# EAGLE board AutoSpiel v1.2a (EAGLE 9.2.0)
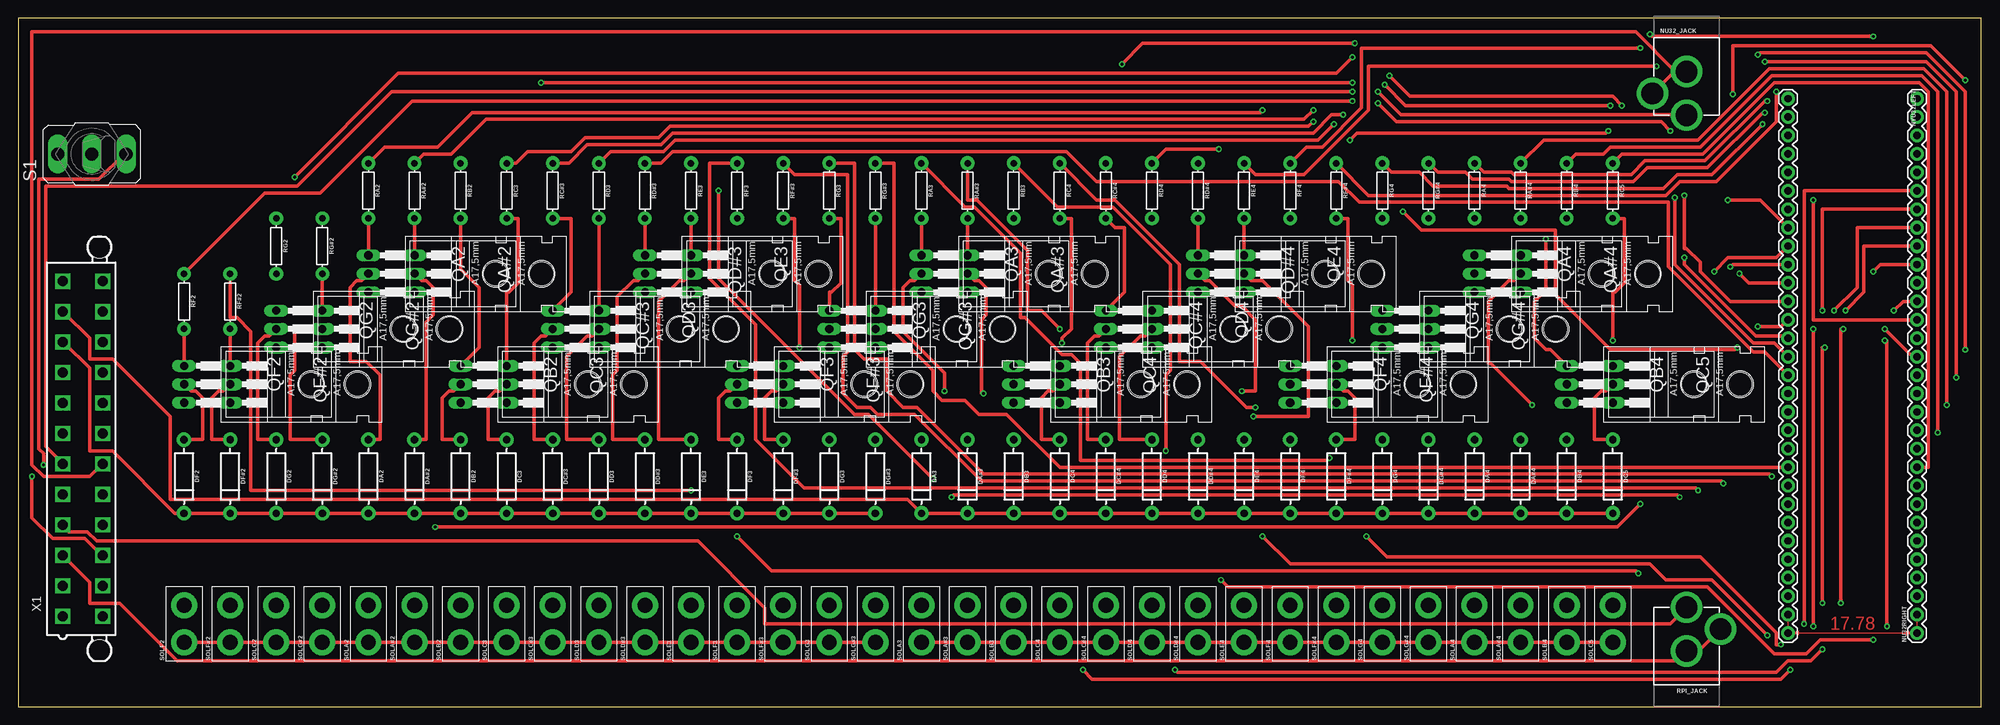
[diagram p0: board, top side]
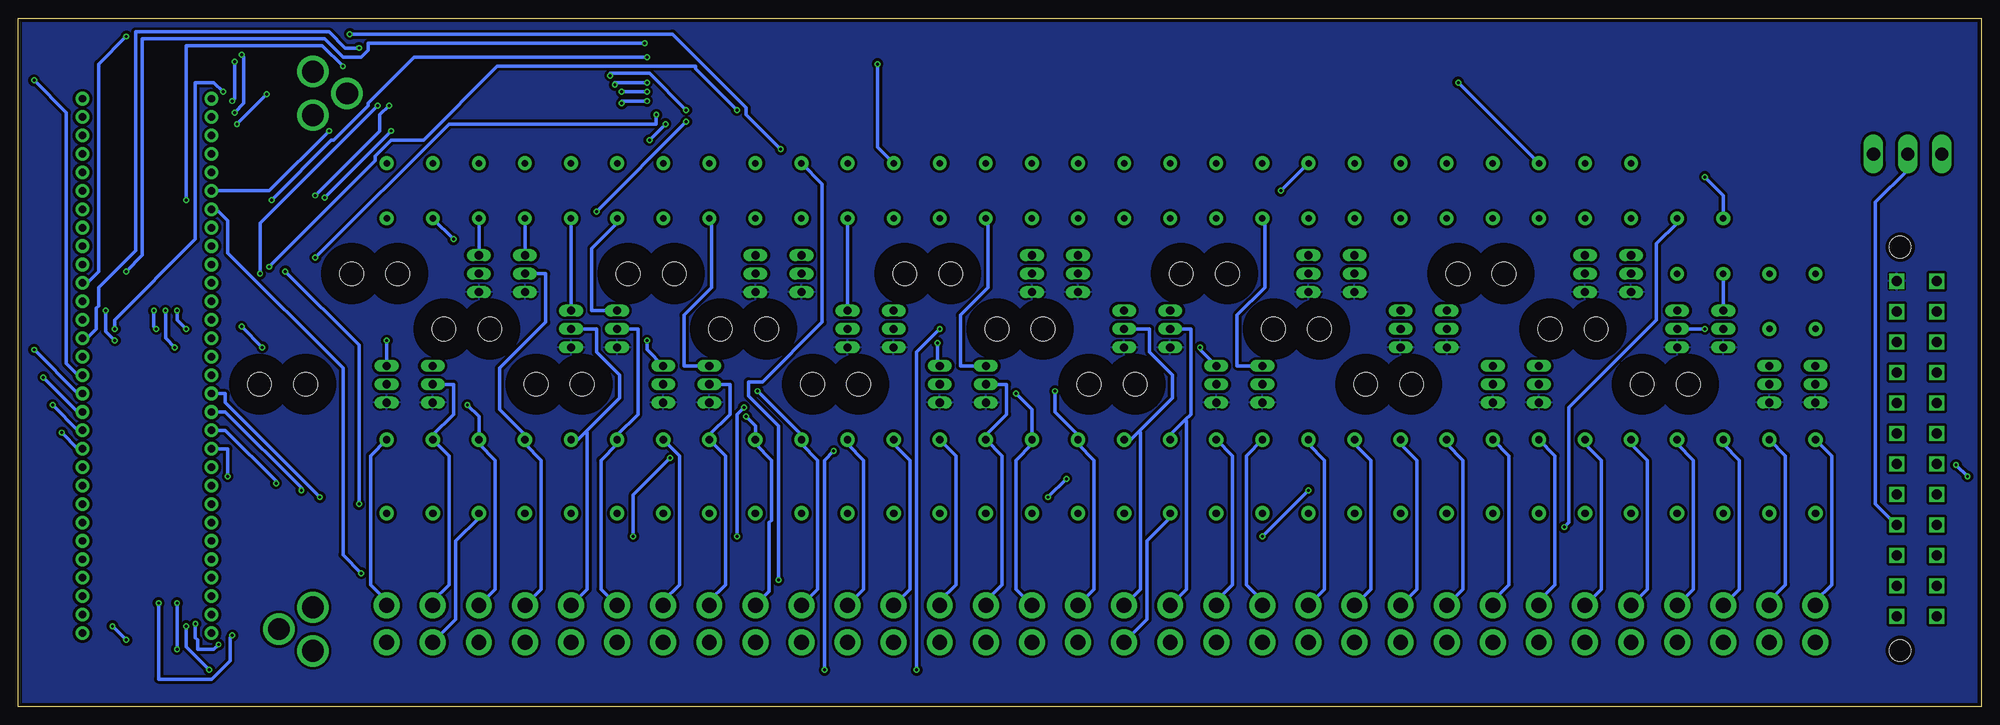
[diagram p1: board, bottom side, seen from below]

Size 270.49 x 94.92 mm. Coordinates in mm from the lower left corner, seen from the top.
Outline: 0,0 270.49,0 270.49,94.92 0,94.92 0,0
Copper layers (1*16): Top 0.035mm / dielectric 1.5mm / Bottom 0.035mm
Design rules "Standard *": minimum track width 20mil, minimum drill 15mil, track to track 15mil, track to pad 15mil, pad to pad 15mil, via to via 15mil, smd to smd 10mil, copper to edge 20mil, drill to drill 10mil, minimum pad ring 8mil, minimum via ring 8mil, stop-mask expansion 4mil, vias tented up to drill 0mil, thermal gap 10mil

## Footprints (pad centres in the part's own frame; a part is rotated, then mirrored left to right if it is on the bottom)
DIODE-1N4001 = drill 1 pad 1.981: A -5.08,0; C 5.08,0
POWER_JACK_PTH = drill 2.997 pad 4.318: GND 0,7.7; GNDBREAK 4.7,10.7; PWR 0,13.7
1X30 = drill 1.016 pad 1.88: 1 0,0; 2 2.54,0; 3 5.08,0; 4 7.62,0; 5 10.16,0; 6 12.7,0; 7 15.24,0; 8 17.78,0; 9 20.32,0; 10 22.86,0; 11 25.4,0; 12 27.94,0; 13 30.48,0; 14 33.02,0; 15 35.56,0; 16 38.1,0; 17 40.64,0; 18 43.18,0; 19 45.72,0; 20 48.26,0; 21 50.8,0; 22 53.34,0; 23 55.88,0; 24 58.42,0; 25 60.96,0; 26 63.5,0; 27 66.04,0; 28 68.58,0; 29 71.12,0; 30 73.66,0
TO220AH = drill 1.118 long: B -2.54,-6.35; C 0,-6.35; E 2.54,-6.35 | hole 3.302: 0,11.176
AXIAL-0.3 = drill 0.9 pad 1.88: P$1 -3.81,0; P$2 3.81,0
M9040P = drill 1.803 long: 1 0,4.699; 2 0,0; 3 0,-4.699
1X02_XTRA_BIG = drill 2.057 pad 3.556: 1 -2.54,0; 2 2.54,0
5566-24 = drill 1.4 square: 1 23.1,-2.75; 2 18.9,-2.75; 3 14.7,-2.75; 4 10.5,-2.75; 5 6.3,-2.75; 6 2.1,-2.75; 7 -2.1,-2.75; 8 -6.3,-2.75; 9 -10.5,-2.75; 10 -14.7,-2.75; 11 -18.9,-2.75; 12 -23.1,-2.75; 13 23.1,2.75; 14 18.9,2.75; 15 14.7,2.75; 16 10.5,2.75; 17 6.3,2.75; 18 2.1,2.75; 19 -2.1,2.75; 20 -6.3,2.75; 21 -10.5,2.75; 22 -14.7,2.75; 23 -18.9,2.75; 24 -23.1,2.75 | hole 3: 27.8,2.29; -27.8,2.29

## Placement (x,y rotation side)
DA2  1A/50V/1.1V  [DIODE-1N4001]  48.26,31.75 270 top
DA3  1A/50V/1.1V  [DIODE-1N4001]  124.46,31.75 270 top
DA4  1A/50V/1.1V  [DIODE-1N4001]  200.66,31.75 270 top
DA#2  1A/50V/1.1V  [DIODE-1N4001]  54.61,31.75 270 top
DA#3  1A/50V/1.1V  [DIODE-1N4001]  130.81,31.75 270 top
DA#4  1A/50V/1.1V  [DIODE-1N4001]  207.01,31.75 270 top
DB2  1A/50V/1.1V  [DIODE-1N4001]  60.96,31.75 270 top
DB3  1A/50V/1.1V  [DIODE-1N4001]  137.16,31.75 270 top
DB4  1A/50V/1.1V  [DIODE-1N4001]  213.36,31.75 270 top
DC3  1A/50V/1.1V  [DIODE-1N4001]  67.31,31.75 270 top
DC4  1A/50V/1.1V  [DIODE-1N4001]  143.51,31.75 270 top
DC5  1A/50V/1.1V  [DIODE-1N4001]  219.71,31.75 270 top
DC#3  1A/50V/1.1V  [DIODE-1N4001]  73.66,31.75 270 top
DC#4  1A/50V/1.1V  [DIODE-1N4001]  149.86,31.75 270 top
DD3  1A/50V/1.1V  [DIODE-1N4001]  80.01,31.75 270 top
DD4  1A/50V/1.1V  [DIODE-1N4001]  156.21,31.75 270 top
DD#3  1A/50V/1.1V  [DIODE-1N4001]  86.36,31.75 270 top
DD#4  1A/50V/1.1V  [DIODE-1N4001]  162.56,31.75 270 top
DE3  1A/50V/1.1V  [DIODE-1N4001]  92.71,31.75 270 top
DE4  1A/50V/1.1V  [DIODE-1N4001]  168.91,31.75 270 top
DF2  1A/50V/1.1V  [DIODE-1N4001]  22.86,31.75 270 top
DF3  1A/50V/1.1V  [DIODE-1N4001]  99.06,31.75 270 top
DF4  1A/50V/1.1V  [DIODE-1N4001]  175.26,31.75 270 top
DF#2  1A/50V/1.1V  [DIODE-1N4001]  29.21,31.75 270 top
DF#3  1A/50V/1.1V  [DIODE-1N4001]  105.41,31.75 270 top
DF#4  1A/50V/1.1V  [DIODE-1N4001]  181.61,31.75 270 top
DG2  1A/50V/1.1V  [DIODE-1N4001]  35.56,31.75 270 top
DG3  1A/50V/1.1V  [DIODE-1N4001]  111.76,31.75 270 top
DG4  1A/50V/1.1V  [DIODE-1N4001]  187.96,31.75 270 top
DG#2  1A/50V/1.1V  [DIODE-1N4001]  41.91,31.75 270 top
DG#3  1A/50V/1.1V  [DIODE-1N4001]  118.11,31.75 270 top
DG#4  1A/50V/1.1V  [DIODE-1N4001]  194.31,31.75 270 top
NU32_JACK  POWER_JACK  [POWER_JACK_PTH]  229.87,95.25 180 top
NU32RIGHT  [1X30]  261.62,10.16 90 top
NYU32LEFT  [1X30]  243.84,10.16 90 top
QA2  TIP120  [TO220AH]  54.61,59.69 270 top
QA3  TIP120  [TO220AH]  130.81,59.69 270 top
QA4  TIP120  [TO220AH]  207.01,59.69 270 top
QA#2  TIP120  [TO220AH]  60.96,59.69 270 top
QA#3  TIP120  [TO220AH]  137.16,59.69 270 top
QA#4  TIP120  [TO220AH]  213.36,59.69 270 top
QB2  TIP120  [TO220AH]  67.31,44.45 270 top
QB3  TIP120  [TO220AH]  143.51,44.45 270 top
QB4  TIP120  [TO220AH]  219.71,44.45 270 top
QC3  TIP120  [TO220AH]  73.66,44.45 270 top
QC4  TIP120  [TO220AH]  149.86,44.45 270 top
QC5  TIP120  [TO220AH]  226.06,44.45 270 top
QC#3  TIP120  [TO220AH]  80.01,52.07 270 top
QC#4  TIP120  [TO220AH]  156.21,52.07 270 top
QD3  TIP120  [TO220AH]  86.36,52.07 270 top
QD4  TIP120  [TO220AH]  162.56,52.07 270 top
QD#3  TIP120  [TO220AH]  92.71,59.69 270 top
QD#4  TIP120  [TO220AH]  168.91,59.69 270 top
QE3  TIP120  [TO220AH]  99.06,59.69 270 top
QE4  TIP120  [TO220AH]  175.26,59.69 270 top
QF2  TIP120  [TO220AH]  29.21,44.45 270 top
QF3  TIP120  [TO220AH]  105.41,44.45 270 top
QF4  TIP120  [TO220AH]  181.61,44.45 270 top
QF#2  TIP120  [TO220AH]  35.56,44.45 270 top
QF#3  TIP120  [TO220AH]  111.76,44.45 270 top
QF#4  TIP120  [TO220AH]  187.96,44.45 270 top
QG2  TIP120  [TO220AH]  41.91,52.07 270 top
QG3  TIP120  [TO220AH]  118.11,52.07 270 top
QG4  TIP120  [TO220AH]  194.31,52.07 270 top
QG#2  TIP120  [TO220AH]  48.26,52.07 270 top
QG#3  TIP120  [TO220AH]  124.46,52.07 270 top
QG#4  TIP120  [TO220AH]  200.66,52.07 270 top
RA2  1k  [AXIAL-0.3]  48.26,71.12 270 top
RA3  1k  [AXIAL-0.3]  124.46,71.12 270 top
RA4  1k  [AXIAL-0.3]  200.66,71.12 270 top
RA#2  1k  [AXIAL-0.3]  54.61,71.12 270 top
RA#3  1k  [AXIAL-0.3]  130.81,71.12 270 top
RA#4  1k  [AXIAL-0.3]  207.01,71.12 270 top
RB2  1k  [AXIAL-0.3]  60.96,71.12 270 top
RB3  1k  [AXIAL-0.3]  137.16,71.12 270 top
RB4  1k  [AXIAL-0.3]  213.36,71.12 270 top
RC3  1k  [AXIAL-0.3]  67.31,71.12 270 top
RC4  1k  [AXIAL-0.3]  143.51,71.12 270 top
RC5  1k  [AXIAL-0.3]  219.71,71.12 270 top
RC#3  1k  [AXIAL-0.3]  73.66,71.12 270 top
RC#4  1k  [AXIAL-0.3]  149.86,71.12 270 top
RD3  1k  [AXIAL-0.3]  80.01,71.12 270 top
RD4  1k  [AXIAL-0.3]  156.21,71.12 270 top
RD#3  1k  [AXIAL-0.3]  86.36,71.12 270 top
RD#4  1k  [AXIAL-0.3]  162.56,71.12 270 top
RE3  1k  [AXIAL-0.3]  92.71,71.12 270 top
RE4  1k  [AXIAL-0.3]  168.91,71.12 270 top
RF2  1k  [AXIAL-0.3]  22.86,55.88 270 top
RF3  1k  [AXIAL-0.3]  99.06,71.12 270 top
RF4  1k  [AXIAL-0.3]  175.26,71.12 270 top
RF#2  1k  [AXIAL-0.3]  29.21,55.88 270 top
RF#3  1k  [AXIAL-0.3]  105.41,71.12 270 top
RF#4  1k  [AXIAL-0.3]  181.61,71.12 270 top
RG2  1k  [AXIAL-0.3]  35.56,63.5 270 top
RG3  1k  [AXIAL-0.3]  111.76,71.12 270 top
RG4  1k  [AXIAL-0.3]  187.96,71.12 270 top
RG#2  1k  [AXIAL-0.3]  41.91,63.5 270 top
RG#3  1k  [AXIAL-0.3]  118.11,71.12 270 top
RG#4  1k  [AXIAL-0.3]  194.31,71.12 270 top
RPI_JACK  POWER_JACK  [POWER_JACK_PTH]  229.87,0 0 top
S1  [M9040P]  10.16,76.2 90 top
SOLA2  [1X02_XTRA_BIG]  48.26,11.43 90 top
SOLA3  [1X02_XTRA_BIG]  124.46,11.43 90 top
SOLA4  [1X02_XTRA_BIG]  200.66,11.43 90 top
SOLA#2  [1X02_XTRA_BIG]  54.61,11.43 90 top
SOLA#3  [1X02_XTRA_BIG]  130.81,11.43 90 top
SOLA#4  [1X02_XTRA_BIG]  207.01,11.43 90 top
SOLB2  [1X02_XTRA_BIG]  60.96,11.43 90 top
SOLB3  [1X02_XTRA_BIG]  137.16,11.43 90 top
SOLB4  [1X02_XTRA_BIG]  213.36,11.43 90 top
SOLC3  [1X02_XTRA_BIG]  67.31,11.43 90 top
SOLC4  [1X02_XTRA_BIG]  143.51,11.43 90 top
SOLC5  [1X02_XTRA_BIG]  219.71,11.43 90 top
SOLC#3  [1X02_XTRA_BIG]  73.66,11.43 90 top
SOLC#4  [1X02_XTRA_BIG]  149.86,11.43 90 top
SOLD3  [1X02_XTRA_BIG]  80.01,11.43 90 top
SOLD4  [1X02_XTRA_BIG]  156.21,11.43 90 top
SOLD#3  [1X02_XTRA_BIG]  86.36,11.43 90 top
SOLD#4  [1X02_XTRA_BIG]  162.56,11.43 90 top
SOLE3  [1X02_XTRA_BIG]  92.71,11.43 90 top
SOLE4  [1X02_XTRA_BIG]  168.91,11.43 90 top
SOLF2  [1X02_XTRA_BIG]  22.86,11.43 90 top
SOLF3  [1X02_XTRA_BIG]  99.06,11.43 90 top
SOLF4  [1X02_XTRA_BIG]  175.26,11.43 90 top
SOLF#2  [1X02_XTRA_BIG]  29.21,11.43 90 top
SOLF#3  [1X02_XTRA_BIG]  105.41,11.43 90 top
SOLF#4  [1X02_XTRA_BIG]  181.61,11.43 90 top
SOLG2  [1X02_XTRA_BIG]  35.56,11.43 90 top
SOLG3  [1X02_XTRA_BIG]  111.76,11.43 90 top
SOLG4  [1X02_XTRA_BIG]  187.96,11.43 90 top
SOLG#2  [1X02_XTRA_BIG]  41.91,11.43 90 top
SOLG#3  [1X02_XTRA_BIG]  118.11,11.43 90 top
SOLG#4  [1X02_XTRA_BIG]  194.31,11.43 90 top
X1  5566-24  [5566-24]  8.89,35.56 270 top

## Library data of the parts
DA2-DA4 DA#2-DA#4 DB2-DB4 DC3-DC5 DC#3 DC#4 DD3 DD4 DD#3 DD#4 DE3 DE4 DF2-DF4 DF#2-DF#4 DG2-DG4 DG#2-DG#4 = SparkFun-DiscreteSemi; PROD_ID: DIO-09176
NU32_JACK RPI_JACK = SparkFun-Connectors; PROD_ID: CONN-08197
NU32RIGHT NYU32LEFT SOLA2-SOLA4 SOLA#2-SOLA#4 SOLB2-SOLB4 SOLC3-SOLC5 SOLC#3 SOLC#4 SOLD3 SOLD4 SOLD#3 SOLD#4 SOLE3 SOLE4 SOLF2-SOLF4 SOLF#2-SOLF#4 SOLG2-SOLG4 SOLG#2-SOLG#4 = SparkFun-Connectors
QA2-QA4 QA#2-QA#4 QB2-QB4 QC3-QC5 QC#3 QC#4 QD3 QD4 QD#3 QD#4 QE3 QE4 QF2-QF4 QF#2-QF#4 QG2-QG4 QG#2-QG#4 = transistor-power
RA2-RA4 RA#2-RA#4 RB2-RB4 RC3-RC5 RC#3 RC#4 RD3 RD4 RD#3 RD#4 RE3 RE4 RF2-RF4 RF#2-RF#4 RG2-RG4 RG#2-RG#4 = SparkFun-Resistors; PROD_ID: RES-08380
S1 = switch
X1 = con-molex; MF: MOLEX; OC_FARNELL: unknown; OC_NEWARK: unknown

## Nets
A2: NYU32LEFT.21 RA2.P$1
A3: NU32RIGHT.25 RA3.P$1
A4: NU32RIGHT.13 RA4.P$1
A#2: NYU32LEFT.20 RA#2.P$1
A#3: NU32RIGHT.24 RA#3.P$1
A#4: NU32RIGHT.12 RA#4.P$1
B2: NYU32LEFT.19 RB2.P$1
B3: NU32RIGHT.23 RB3.P$1
B4: NU32RIGHT.11 RB4.P$1
C3: NYU32LEFT.18 RC3.P$1
C4: NU32RIGHT.22 RC4.P$1
C5: NU32RIGHT.10 RC5.P$1
C#3: NYU32LEFT.17 RC#3.P$1
C#4: NU32RIGHT.21 RC#4.P$1
D3: NYU32LEFT.16 RD3.P$1
D4: NU32RIGHT.20 RD4.P$1
D#3: NYU32LEFT.15 RD#3.P$1
D#4: NU32RIGHT.19 RD#4.P$1
E3: NYU32LEFT.14 RE3.P$1
E4: NU32RIGHT.18 RE4.P$1
F2: NYU32LEFT.25 RF2.P$1
F3: NYU32LEFT.13 RF3.P$1
F4: NU32RIGHT.17 RF4.P$1
F#2: NYU32LEFT.24 RF#2.P$1
F#3: NYU32LEFT.12 RF#3.P$1
F#4: NU32RIGHT.16 RF#4.P$1
G2: NYU32LEFT.23 RG2.P$1
G3: NYU32LEFT.11 RG3.P$1
G4: NU32RIGHT.15 RG4.P$1
G#2: NYU32LEFT.22 RG#2.P$1
G#3: NYU32LEFT.10 RG#3.P$1
G#4: NU32RIGHT.14 RG#4.P$1
GND: QA2.E QA3.E QA4.E QA#2.E QA#3.E QA#4.E QB2.E QB3.E QB4.E QC3.E QC4.E QC5.E QC#3.E QC#4.E QD3.E QD4.E QD#3.E QD#4.E QE3.E QE4.E QF2.E QF3.E QF4.E QF#2.E QF#3.E QF#4.E QG2.E QG3.E QG4.E QG#2.E QG#3.E QG#4.E X1.24
N$1: QF2.B RF2.P$2
N$2: QC#3.B RC#3.P$2
N$3: DF2.A QF2.C SOLF2.2
N$4: QF#2.B RF#2.P$2
N$5: DF#2.A QF#2.C SOLF#2.2
N$6: DC#3.A QC#3.C SOLC#3.2
N$7: QG2.B RG2.P$2
N$8: DG2.A QG2.C SOLG2.2
N$9: QD3.B RD3.P$2
N$10: QG#2.B RG#2.P$2
N$11: DG#2.A QG#2.C SOLG#2.2
N$12: DD3.A QD3.C SOLD3.2
N$13: QA2.B RA2.P$2
N$14: DA2.A QA2.C SOLA2.2
N$15: QD#3.B RD#3.P$2
N$16: QA#2.B RA#2.P$2
N$17: DA#2.A QA#2.C SOLA#2.2
N$18: DD#3.A QD#3.C SOLD#3.2
N$19: QB2.B RB2.P$2
N$20: DB2.A QB2.C SOLB2.2
N$21: QE3.B RE3.P$2
N$22: QC3.B RC3.P$2
N$23: DC3.A QC3.C SOLC3.2
N$24: DE3.A QE3.C SOLE3.2
N$25: QA3.B RA3.P$2
N$26: DA3.A QA3.C SOLA3.2
N$27: QF3.B RF3.P$2
N$28: DF3.A QF3.C SOLF3.2
N$29: QF#3.B RF#3.P$2
N$30: DF#3.A QF#3.C SOLF#3.2
N$31: QG3.B RG3.P$2
N$32: DG3.A QG3.C SOLG3.2
N$33: QG#3.B RG#3.P$2
N$34: DG#3.A QG#3.C SOLG#3.2
N$35: QF4.B RF4.P$2
N$36: DF4.A QF4.C SOLF4.2
N$37: QF#4.B RF#4.P$2
N$38: DF#4.A QF#4.C SOLF#4.2
N$39: QG4.B RG4.P$2
N$40: DG4.A QG4.C SOLG4.2
N$41: QG#4.B RG#4.P$2
N$42: DG#4.A QG#4.C SOLG#4.2
N$43: QA4.B RA4.P$2
N$44: DA4.A QA4.C SOLA4.2
N$45: QA#4.B RA#4.P$2
N$46: DA#4.A QA#4.C SOLA#4.2
N$47: QB4.B RB4.P$2
N$48: DB4.A QB4.C SOLB4.2
N$49: QC5.B RC5.P$2
N$50: DC5.A QC5.C SOLC5.2
N$52: QA#3.B RA#3.P$2
N$53: DA#3.A QA#3.C SOLA#3.2
N$55: QB3.B RB3.P$2
N$56: DB3.A QB3.C SOLB3.2
N$57: S1.1
N$58: QC4.B RC4.P$2
N$59: DC4.A QC4.C SOLC4.2
N$61: QC#4.B RC#4.P$2
N$62: DC#4.A QC#4.C SOLC#4.2
N$64: QD4.B RD4.P$2
N$65: DD4.A QD4.C SOLD4.2
N$67: QD#4.B RD#4.P$2
N$68: DD#4.A QD#4.C SOLD#4.2
N$70: QE4.B RE4.P$2
N$71: DE4.A QE4.C SOLE4.2
NU32GND: NU32_JACK.GND NU32_JACK.GNDBREAK X1.18
NU32PWR: NU32_JACK.PWR X1.6
PS_ON: S1.2 X1.16
PS_ONGND: S1.3 X1.15
RPI_GND: RPI_JACK.GND RPI_JACK.GNDBREAK X1.3
RPI_PWR: RPI_JACK.PWR X1.4
VDD1: DA2.C DA#2.C DB2.C DC3.C DC#3.C DD3.C DD#3.C DE3.C DF2.C DF3.C DF#2.C DF#3.C DG2.C DG3.C DG#2.C DG#3.C SOLA2.1 SOLA#2.1 SOLB2.1 SOLC3.1 SOLC#3.1 SOLD3.1 SOLD#3.1 SOLE3.1 SOLF2.1 SOLF3.1 SOLF#2.1 SOLF#3.1 SOLG2.1 SOLG3.1 SOLG#2.1 SOLG#3.1 X1.10
VDD2: DA3.C DA4.C DA#3.C DA#4.C DB3.C DB4.C DC4.C DC5.C DC#4.C DD4.C DD#4.C DE4.C DF4.C DF#4.C DG4.C DG#4.C SOLA3.1 SOLA4.1 SOLA#3.1 SOLA#4.1 SOLB3.1 SOLB4.1 SOLC4.1 SOLC5.1 SOLC#4.1 SOLD4.1 SOLD#4.1 SOLE4.1 SOLF4.1 SOLF#4.1 SOLG4.1 SOLG#4.1 X1.11

## Tracks (layer width: path | path; a pad name or v marks a point on that pad's centre or on a via)
A2  (via drill 0.41)
  Top 0.508: NYU32LEFT.21 236.22,60.96 v235.9,60.64 | v171.45,82.23 171.13,81.91 62.55,81.91 57.78,77.15 50.48,77.15 RA2.P$1
  Bottom 0.508: v235.9,60.64 221.3,75.25 221.3,75.88 219.07,78.1 214.63,78.1 204.47,88.26 177.16,88.26 177.16,87.95 v171.45,82.23
A3  (via drill 0.41)
  Top 0.508: RA3.P$1 130.49,68.9 131.76,68.9 138.11,62.55 138.11,53.66 138.75,53.66 143.83,48.58 145.1,48.58 146.37,47.31 146.37,33.97 180.34,33.97 v180.66,34.29 | v185.74,23.49 188.59,20.64 231.78,20.64 242.25,10.16 242.25,8.57 v242.89,8.57 | v246.06,11.43 246.06,71.12 NU32RIGHT.25
  Bottom 0.508: v180.66,34.29 185.74,29.21 v185.74,23.49 | v242.89,8.57 243.52,7.94 245.75,7.94 245.75,9.21 246.06,9.52 v246.06,11.43
A4  (via drill 0.41)
  Top 0.508: RA4.P$1 201.93,73.66 205.74,73.66 206.06,73.34 222.25,73.34 224.16,75.25 232.41,75.25 240.66,83.5 v240.98,83.5 | v240.66,88.9 262.89,88.9 267.02,84.77 v267.02,45.4
  Bottom 0.508: v240.98,83.5 240.66,83.82 v240.66,88.9 | v267.02,45.4 262.25,40.64 NU32RIGHT.13
A#2  (via drill 0.41)
  Top 0.508: RA#2.P$1 55.88,76.2 59.69,76.2 64.45,80.96 177.16,80.96 v178.44,82.23 | v188.91,87 191.77,84.14 219.71,84.14 v220.98,82.87 | v237.17,59.69 238.44,58.42 NYU32LEFT.20
  Bottom 0.508: v178.44,82.23 183.51,87.31 188.91,87.31 v188.91,87 | v220.98,82.87 237.17,66.68 v237.17,59.69
A#3  (via drill 0.41)
  Top 0.508: RA#3.P$1 130.81,69.85 132.08,69.85 139.06,62.87 139.06,54.61 140.97,54.61 v143.51,52.07 | v146.69,5.08 147.96,3.81 242.89,3.81 v244.16,5.08 | v247.33,52.07 v247.33,11.11 | v248.6,54.61 248.6,68.58 NU32RIGHT.24
  Bottom 0.508: v143.51,52.07 146.69,48.9 v146.69,5.08 | v244.16,5.08 247.33,8.26 v247.33,11.11 | v247.33,52.07 248.6,53.34 v248.6,54.61
A#4  (via drill 0.41)
  Top 0.508: RA#4.P$1 210.19,78.1 231.46,78.1 241.3,87.95 262.57,87.95 265.75,84.77 v265.75,41.59
  Bottom 0.508: v265.75,41.59 262.25,38.1 NU32RIGHT.12
B2  (via drill 0.41)
  Top 0.508: v183.83,86.04 v72.07,86.04 | v188.28,85.72 191.13,82.87 v219.39,82.87 | v229.55,70.48 229.55,63.18 229.87,63.18 231.78,61.28 231.78,60.01 235.9,55.88 NYU32LEFT.19
  Bottom 0.508: v72.07,86.04 RB2.P$1 | v183.83,86.04 188.28,86.04 v188.28,85.72 | v219.39,82.87 220.66,81.6 220.66,79.38 v229.55,70.48
B3  (via drill 0.41)
  Top 0.508: RB3.P$1 143.19,68.9 150.81,68.9 158.75,60.96 158.75,46.35 158.12,45.72 v158.12,35.24 | v159.38,5.08 159.7,4.76 242.25,4.76 243.84,6.35 247.01,6.35 v248.6,7.94 | v248.6,14.29 248.6,49.53 v248.92,49.53 | v250.19,54.61 253.37,57.79 253.37,66.04 NU32RIGHT.23
  Bottom 0.508: v158.12,35.24 159.38,33.97 v159.38,5.08 | v248.6,14.29 v248.6,7.94 | v248.92,49.53 250.19,50.8 v250.19,54.61
B4  (via drill 0.41)
  Top 0.508: RB4.P$1 214.63,76.2 218.44,76.2 219.39,77.15 231.78,77.15 241.62,87 262.25,87 264.48,84.77 v264.48,37.78
  Bottom 0.508: v264.48,37.78 262.25,35.56 NU32RIGHT.11
C3  (via drill 0.41)
  Top 0.508: NYU32LEFT.18 242.89,52.39 v239.71,52.39 | v236.85,49.53 236.54,49.21 219.39,49.21 211.77,56.83 211.77,65.72 193.36,65.72 v190.82,68.26 | v178.44,80.64 177.8,80.01 89.85,80.01 88.27,78.42 78.11,78.42 76.2,76.52 70.17,76.52 68.58,74.93 RC3.P$1
  Bottom 0.508: v236.85,49.53 v239.71,52.39 | v178.44,80.64 v190.82,68.26
C4  (via drill 0.41)
  Top 0.508: RC4.P$1 148.59,69.85 151.13,69.85 160.02,60.96 160.02,47.62 162.88,47.62 169.23,41.27 v170.5,41.27 | v171.45,23.49 175.26,19.68 224.79,19.68 227.01,17.46 233.36,17.46 v240.98,9.84 | v251.14,14.29 251.14,52.07 v251.46,52.07 | v251.78,54.61 254.32,57.15 254.32,63.5 NU32RIGHT.22
  Bottom 0.508: v170.5,41.27 171.45,40.32 v171.45,23.49 | v240.98,9.84 241.3,9.52 241.3,6.35 243.84,3.81 251.14,3.81 v251.14,14.29 | v251.46,52.07 251.78,52.39 v251.78,54.61
C5
  Top 0.508: RC5.P$1 220.98,76.2 232.09,76.2 241.94,86.04 261.94,86.04 263.21,84.77 263.21,33.02 NU32RIGHT.10
C#3  (via drill 0.41)
  Top 0.508: NYU32LEFT.17 243.52,51.12 239.4,51.12 229.55,60.96 v229.55,61.91 | v182.56,81.6 180.97,81.6 178.44,79.06 90.17,79.06 88.58,77.47 78.42,77.47 75.88,74.93 RC#3.P$1
  Bottom 0.508: v229.55,61.91 211.14,80.33 182.56,80.33 v182.56,81.6
C#4  (via drill 0.41)
  Top 0.508: v152.08,88.58 154.94,91.44 v184.15,91.44 | v255.59,60.01 256.54,60.96 NU32RIGHT.21
  Bottom 0.508: RC#4.P$1 152.08,77.15 v152.08,88.58 | v184.15,91.44 222.25,91.44 222.25,90.49 223.2,89.53 225.74,89.53 228.28,92.07 253.37,92.07 253.37,62.23 v255.59,60.01
D3  (via drill 0.41)
  Top 0.508: NYU32LEFT.16 241.94,50.16 239.08,50.16 228.28,60.96 v228.28,70.17 | v219.07,79.38 218.76,79.06 184.47,79.06 v183.51,78.1 | v181.29,80.33 179.07,78.1 90.49,78.1 88.9,76.52 81.6,76.52 RD3.P$1
  Bottom 0.508: v219.07,79.38 v228.28,70.17 | v181.29,80.33 v183.51,78.1
D4  (via drill 0.41)
  Top 0.508: RD4.P$1 158.12,76.83 v165.42,76.83 | v224.79,92.71 225.11,92.39 v255.59,92.39
  Bottom 0.508: v165.42,76.83 170.18,81.6 170.18,82.55 180.34,92.71 v224.79,92.71 | v255.59,92.39 259.4,88.58 259.4,60.01 260.99,58.42 NU32RIGHT.20
D#3
  Top 0.508: NYU32LEFT.15 240.66,48.9 239.08,48.9 227.33,60.64 227.33,69.53 184.78,69.53 181.93,72.39 148.59,72.39 144.46,76.52 90.17,76.52 88.58,74.93 RD#3.P$1
D#4  (via drill 0.41)
  Top 0.508: v165.74,17.46 166.69,16.51 232.73,16.51 241.94,7.3 246.38,7.3 248.28,9.21 v255.59,9.21 | v257.49,11.11 257.49,50.48 v257.18,50.48 | v258.44,54.61 259.71,55.88 NU32RIGHT.19
  Bottom 0.508: RD#4.P$1 159.7,72.07 159.7,53.02 167.96,44.77 169.86,44.77 169.86,42.86 165.74,38.73 v165.74,17.46 | v257.49,11.11 v255.59,9.21 | v257.18,50.48 258.44,51.75 v258.44,54.61
E3  (via drill 0.41)
  Top 0.508: v228.92,28.89 228.6,29.21 128.91,29.21 v128.59,28.89 | v126.05,31.43 117.16,40.32 115.25,40.32 96.52,59.05 v96.52,71.12
  Bottom 0.508: NYU32LEFT.14 241.94,43.18 241.94,41.91 v228.92,28.89 | v126.05,31.43 v128.59,28.89 | RE3.P$1 v96.52,71.12
E4  (via drill 0.41)
  Top 0.508: RE4.P$1 170.5,73.34 177.16,73.34 186.06,82.23 186.06,88.26 v225.74,88.26 | v247.33,69.85 247.33,53.34 NU32RIGHT.18
  Bottom 0.508: v225.74,88.26 228.6,91.12 247.33,91.12 v247.33,69.85
F2  (via drill 0.41)
  Top 0.508: RF2.P$1 33.97,70.8 41.59,70.8 54.29,83.5 v183.83,83.5 | v187.32,83.19 189.87,80.64 226.38,80.64 v227.65,79.38
  Bottom 0.508: v183.83,83.5 187.32,83.5 v187.32,83.19 | v227.65,79.38 235.9,71.12 NYU32LEFT.25
F3  (via drill 0.41)
  Top 0.508: v231.46,29.85 231.14,30.16 108.27,30.16 101.6,36.83 101.6,52.71 95.25,59.05 95.25,74.93 RF3.P$1
  Bottom 0.508: NYU32LEFT.13 241.94,40.64 231.46,30.16 v231.46,29.85
F4  (via drill 0.41)
  Top 0.508: RF4.P$1 177.48,77.15 179.71,77.15 185.1,82.55 185.1,90.8 v223.52,90.8
  Bottom 0.508: v223.52,90.8 225.43,90.8 227.65,93.03 254.32,93.03 254.32,62.87 259.4,57.79 259.4,55.24 259.71,54.93 259.71,52.07 260.99,50.8 NU32RIGHT.17
F#2  (via drill 0.41)
  Top 0.508: RF#2.P$1 29.21,53.66 30.16,53.66 32.07,51.75 32.07,29.85 v92.71,29.85 | v99.06,23.49 103.82,18.73 222.88,18.73 v223.2,18.41
  Bottom 0.508: v99.06,23.49 v92.71,29.85 | v223.2,18.41 225.74,20.96 225.74,46.67 241.62,62.55 241.62,66.99 243.21,68.58 NYU32LEFT.24
F#3  (via drill 0.41)
  Top 0.508: v234.95,30.8 234.63,31.12 132.72,31.12 123.51,40.32 118.43,40.32 117.47,41.27 115.57,41.27 113.67,43.18 113.67,48.26 114.3,48.9 114.3,73.34 107,73.34 RF#3.P$1
  Bottom 0.508: NYU32LEFT.12 241.94,38.1 234.95,31.12 v234.95,30.8
F#4  (via drill 0.41)
  Top 0.508: RF#4.P$1 186.06,70.48 227.01,70.48 228.92,72.39 234,72.39 242.25,80.64 v242.25,84.77 | v257.18,52.07 260.99,48.26 NU32RIGHT.16
  Bottom 0.508: v242.25,84.77 243.52,86.04 246.06,86.04 246.06,64.45 257.18,53.34 v257.18,52.07
G2  (via drill 0.41)
  Top 0.508: NYU32LEFT.23 240.03,69.85 v235.59,69.85 | v183.83,89.53 181.61,87.31 52.39,87.31 v38.1,73.03
  Bottom 0.508: v235.59,69.85 227.33,78.1 227.01,78.1 222.25,82.87 222.25,83.19 215.9,89.53 v183.83,89.53 | v38.1,73.03 35.56,70.48 RG2.P$1
G3  (via drill 0.41)
  Top 0.508: v241.62,31.75 241.3,32.07 133.03,32.07 123.83,41.27 121.92,41.27 119.7,43.5 119.7,47.94 116.52,47.94 115.25,49.21 115.25,74.93 RG3.P$1
  Bottom 0.508: NYU32LEFT.11 241.62,35.56 v241.62,31.75
G4  (via drill 0.41)
  Top 0.508: RG4.P$1 189.23,73.66 193.04,73.66 194.94,71.75 205.1,71.75 205.42,71.44 226.69,71.44 228.6,73.34 233.36,73.34 v240.35,80.33 | v236.22,84.45 236.22,91.12 263.52,91.12 v268.29,86.36
  Bottom 0.508: v236.22,84.45 v240.35,80.33 | v268.29,86.36 263.84,81.91 263.84,47.31 262.25,45.72 NU32RIGHT.15
G#2  (via drill 0.41)
  Top 0.508: NYU32LEFT.22 242.25,61.91 235.59,61.91 v233.68,60.01 | v223.52,27.94 220.34,24.76 v57.47,24.76
  Bottom 0.508: v233.68,60.01 223.52,49.85 v223.52,27.94 | v57.47,24.76 56.83,25.4 56.83,41.27 44.77,53.34 44.77,63.82 41.91,66.68 RG#2.P$1
G#3
  Top 0.508: NYU32LEFT.10 143.51,33.02 136.21,40.32 132.4,40.32 130.49,42.23 127.32,42.23 126.05,43.5 126.05,46.35 120.65,51.75 120.65,74.93 RG#3.P$1
G#4  (via drill 0.41)
  Top 0.508: RG#4.P$1 195.58,73.66 199.39,73.66 200.34,72.71 205.42,72.71 205.74,72.39 222.57,72.39 224.47,74.29 232.73,74.29 240.35,81.91 v240.66,81.91 | v239.71,89.85 240.03,90.17 262.89,90.17 268.29,84.77 v268.29,49.21
  Bottom 0.508: v240.66,81.91 239.4,83.19 239.4,89.53 v239.71,89.85 | v268.29,49.21 262.25,43.18 NU32RIGHT.14
GND
  pour Bottom: 0,93.98 0,0 270.51,0 270.51,95.25 0,95.25
N$1
  Top 0.508: RF2.P$2 QF2.B
N$2
  Top 0.508: QC#3.B 76.2,57.15 76.2,67.31 RC#3.P$2
N$3
  Top 0.508: QF2.C 23.81,43.5 24.45,43.5 25.4,42.54 25.4,36.83 DF2.A
  Bottom 0.508: DF2.A 20.64,34.61 20.64,16.83 22.86,14.6 SOLF2.2
N$4
  Top 0.508: RF#2.P$2 QF#2.B
N$5
  Top 0.508: QF#2.C 28.26,43.5 27.62,43.5 26.67,42.54 26.67,36.83 DF#2.A
  Bottom 0.508: DF#2.A 26.99,34.61 26.99,16.83 29.21,14.6 SOLF#2.2
N$6
  Top 0.508: QC#3.C 72.71,51.12 72.07,51.12 71.12,50.16 71.12,36.83 DC#3.A
  Bottom 0.508: SOLC#3.2 71.44,16.19 71.44,33.97 73.66,36.2 DC#3.A
N$7
  Bottom 0.508: RG2.P$2 QG2.B
N$8
  Top 0.508: QG2.C 34.61,51.12 33.97,51.12 33.02,50.16 33.02,36.83 DG2.A
  Bottom 0.508: SOLG2.2 33.34,16.19 33.34,33.97 35.56,36.2 DG2.A
N$9
  Top 0.508: RD3.P$2 QD3.B
N$10
  Top 0.508: RG#2.P$2 QG#2.B
N$11  (via drill 0.41)
  Top 0.508: v38.1,52.07 38.1,46.35 37.47,45.72 37.47,36.83 DG#2.A
  Bottom 0.508: v38.1,52.07 QG#2.C | SOLG#2.2 39.69,16.19 39.69,33.97 41.91,36.2 DG#2.A
N$12
  Top 0.508: QD3.C 79.06,51.12 78.42,51.12 75.56,48.26 75.56,36.83 DD3.A
  Bottom 0.508: SOLD3.2 77.79,16.19 77.79,33.97 80.01,36.2 DD3.A
N$13
  Top 0.508: RA2.P$2 QA2.B
N$14
  Top 0.508: QA2.C 47.31,58.74 46.67,58.74 45.72,57.79 45.72,47.62 47.94,47.62 49.85,45.72 49.85,36.83 DA2.A
  Bottom 0.508: SOLA2.2 46.04,16.19 46.04,33.97 48.26,36.2 DA2.A
N$15
  Top 0.508: RD#3.P$2 QD#3.B
N$16
  Top 0.508: RA#2.P$2 QA#2.B
N$17
  Top 0.508: QA#2.C 55.56,58.74 56.2,58.74 57.15,57.79 57.15,53.98 56.2,53.02 56.2,36.83 DA#2.A
  Bottom 0.508: SOLA#2.2 52.39,16.19 52.39,33.97 54.61,36.2 DA#2.A
N$18
  Top 0.508: QD#3.C 85.41,58.74 84.77,58.74 82.55,56.51 82.55,46.35 81.92,45.72 81.92,36.83 DD#3.A
  Bottom 0.508: SOLD#3.2 84.14,16.19 84.14,33.97 86.36,36.2 DD#3.A
N$19
  Top 0.508: QB2.B 63.5,49.53 63.5,57.79 60.96,60.32 RB2.P$2
N$20
  Top 0.508: QB2.C 60.01,43.5 59.37,43.5 58.42,42.54 58.42,36.83 DB2.A
  Bottom 0.508: DB2.A 58.74,34.61 58.74,16.83 60.96,14.6 SOLB2.2
N$21
  Top 0.508: RE3.P$2 QE3.B
N$22
  Top 0.508: QC3.B 67.31,57.15 67.63,57.15 68.9,58.42 68.9,67.31 RC3.P$2
N$23
  Top 0.508: QC3.C 66.36,43.5 65.72,43.5 64.77,42.54 64.77,36.83 DC3.A
  Bottom 0.508: DC3.A 65.09,34.61 65.09,16.83 67.31,14.6 SOLC3.2
N$24
  Top 0.508: QE3.C 91.76,58.74 91.12,58.74 88.27,55.88 88.27,36.83 DE3.A
  Bottom 0.508: SOLE3.2 90.49,16.19 90.49,33.97 92.71,36.2 DE3.A
N$25
  Top 0.508: RA3.P$2 QA3.B
N$26  (via drill 0.41)
  Top 0.508: QA3.C 123.51,58.74 122.87,58.74 121.92,57.79 121.92,51.75 127.64,46.04 v127.64,43.5
  Bottom 0.508: v127.64,43.5 127.64,40.64 124.46,37.46 DA3.A 124.46,36.2 122.24,33.97 122.24,16.19 SOLA3.2
N$27
  Bottom 0.508: QF3.B 102.55,46.99 102.55,53.98 98.74,57.79 98.74,66.36 99.06,66.68 RF3.P$2
N$28
  Top 0.508: QF3.C 98.11,43.5 97.47,43.5 96.52,42.54 96.52,36.83 DF3.A
  Bottom 0.508: DF3.A 101.28,34.61 101.28,16.83 99.06,14.6 SOLF3.2
N$29  (via drill 0.41)
  Top 0.508: v107.63,49.53 107.63,58.1 107,58.74 107,67.31 RF#3.P$2
  Bottom 0.508: QF#3.B 107.63,49.21 v107.63,49.53
N$30
  Top 0.508: QF#3.C 104.46,43.5 103.82,43.5 102.87,42.54 102.87,36.83 DF#3.A
  Bottom 0.508: DF#3.A 103.19,34.61 103.19,16.83 105.41,14.6 SOLF#3.2
N$31
  Top 0.508: QG3.B 111.76,57.15 112.08,57.15 113.35,58.42 113.35,67.31 RG3.P$2
N$32
  Bottom 0.508: QG3.C 108.9,52.07 108.9,40.32 109.7,39.53 | 109.7,39.53 111.76,37.46 DG3.A | SOLG3.2 109.54,16.19 109.54,39.37 109.7,39.53
N$33
  Top 0.508: RG#3.P$2 QG#3.B
N$34
  Bottom 0.508: QG#3.C 114.62,52.07 114.62,48.9 111.44,45.72 111.44,42.54 116.05,37.94 | 116.05,37.94 117.16,36.83 DG#3.A | SOLG#3.2 115.89,16.19 115.89,37.78 116.05,37.94
N$35
  Bottom 0.508: QF4.B 178.75,46.99 178.75,53.98 174.94,57.79 174.94,66.36 175.26,66.68 RF4.P$2
N$36
  Bottom 0.508: QF4.C 172.4,44.45 172.4,40.32 175.26,37.46 DF4.A 173.04,34.61 173.04,16.83 175.26,14.6 SOLF4.2
N$37  (via drill 0.41)
  Top 0.508: v183.83,50.48 183.83,58.1 183.2,58.74 183.2,67.31 RF#4.P$2
  Bottom 0.508: QF#4.B 183.83,49.21 v183.83,50.48
N$38
  Top 0.508: QF#4.C 182.56,43.5 183.2,43.5 184.15,42.54 184.15,36.83 DF#4.A
  Bottom 0.508: DF#4.A 179.39,34.61 179.39,16.83 181.61,14.6 SOLF#4.2
N$39
  Bottom 0.508: QG4.B 191.45,54.61 191.45,63.18 187.96,66.68 RG4.P$2
N$40
  Bottom 0.508: QG4.C 185.1,52.07 185.1,40.32 187.96,37.46 DG4.A 187.96,36.2 190.18,33.97 190.18,16.19 SOLG4.2
N$41
  Bottom 0.508: RG#4.P$2 QG#4.B
N$42
  Bottom 0.508: QG#4.C 190.82,52.07 190.82,48.9 187.64,45.72 187.64,42.54 192.25,37.94 | 192.25,37.94 193.36,36.83 DG#4.A | SOLG#4.2 192.09,16.19 192.09,37.78 192.25,37.94
N$43
  Bottom 0.508: RA4.P$2 QA4.B
N$44
  Bottom 0.508: QA4.C 197.8,59.69 197.8,53.02 204.15,46.67 204.15,40.96 200.66,37.46 DA4.A 200.66,36.2 198.44,33.97 198.44,16.19 SOLA4.2
N$45
  Bottom 0.508: RA#4.P$2 QA#4.B
N$46  (via drill 0.41)
  Top 0.508: QA#4.C 206.06,58.74 205.42,58.74 202.56,55.88 202.56,47.31 202.88,47.31 v208.6,41.59
  Bottom 0.508: v208.6,41.59 207.01,40.01 DA#4.A 207.01,36.2 204.79,33.97 204.79,16.19 SOLA#4.2
N$47  (via drill 0.41)
  Top 0.508: QB4.B 211.14,49.21 210.5,49.21 208.91,50.8 208.91,55.88 210.5,57.47 v210.5,64.45
  Bottom 0.508: RB4.P$2 v210.5,64.45
N$48
  Bottom 0.508: QB4.C 210.5,44.45 210.5,40.32 213.36,37.46 DB4.A 211.14,34.61 211.14,16.83 213.36,14.6 SOLB4.2
N$49  (via drill 0.41)
  Top 0.508: v219.71,50.48 219.71,57.15 220.03,57.15 221.3,58.42 221.3,67.31 RC5.P$2
  Bottom 0.508: v219.71,50.48 QC5.B
N$50
  Top 0.508: QC5.C 218.76,43.5 218.12,43.5 217.17,42.54 217.17,36.83 DC5.A
  Bottom 0.508: DC5.A 221.93,34.61 221.93,16.83 219.71,14.6 SOLC5.2
N$52
  Top 0.508: RA#3.P$2 QA#3.B
N$53  (via drill 0.41)
  Top 0.508: QA#3.C 131.76,58.74 132.4,58.74 133.35,57.79 133.35,53.98 132.72,53.34 132.72,43.18 v133.03,43.18
  Bottom 0.508: v133.03,43.18 130.81,40.96 DA#3.A 130.81,36.2 133.03,33.97 133.03,16.19 SOLA#3.2
N$55
  Bottom 0.508: QB3.B 140.65,46.99 140.65,53.98 136.84,57.79 136.84,66.36 137.16,66.68 RB3.P$2
N$56
  Bottom 0.508: QB3.C 134.3,44.45 134.3,40.32 137.16,37.46 DB3.A 134.94,34.61 134.94,16.83 137.16,14.6 SOLB3.2
N$58  (via drill 0.41)
  Top 0.508: v143.83,50.16 143.83,50.8 145.1,52.07 145.1,67.31 RC4.P$2
  Bottom 0.508: QC4.B 143.83,47.31 v143.83,50.16
N$59
  Top 0.508: QC4.C 142.56,43.5 141.92,43.5 140.97,42.54 140.97,36.83 DC4.A
  Bottom 0.508: DC4.A 141.29,34.61 141.29,16.83 143.51,14.6 SOLC4.2
N$61
  Top 0.508: QC#4.B 152.4,57.15 152.4,66.04 151.13,66.04 RC#4.P$2
N$62
  Top 0.508: QC#4.C 148.91,51.12 148.27,51.12 147.32,50.16 147.32,36.83 DC#4.A
  Bottom 0.508: SOLC#4.2 147.64,16.19 147.64,33.97 149.86,36.2 DC#4.A
N$64
  Bottom 0.508: RD4.P$2 QD4.B
N$65
  Top 0.508: QD4.C 155.26,51.12 154.62,51.12 151.76,48.26 151.76,36.83 DD4.A
  Bottom 0.508: SOLD4.2 153.99,16.19 153.99,33.97 156.21,36.2 DD4.A
N$67
  Top 0.508: RD#4.P$2 QD#4.B
N$68  (via drill 0.41)
  Top 0.508: QD#4.C 163.51,58.74 164.15,58.74 167.64,55.24 168.59,55.24 170.5,53.34 170.5,43.5 v168.59,43.5
  Bottom 0.508: v168.59,43.5 162.56,37.46 DD#4.A 162.56,36.2 160.34,33.97 160.34,16.19 SOLD#4.2
N$70
  Top 0.508: RE4.P$2 QE4.B
N$71  (via drill 0.41)
  Top 0.508: QE4.C 169.86,58.74 171.45,58.74 177.8,52.39 177.8,40.01 v170.18,40.01
  Bottom 0.508: v170.18,40.01 168.91,38.73 DE4.A 168.91,36.2 166.69,33.97 166.69,25.72 167,25.4 167,15.87 SOLE4.2
NU32GND
  Top 0.508: 228.28,87.63 222.88,93.03 1.91,93.03 1.91,33.34 3.49,31.75 9.84,31.75 11.43,33.34 X1.18 | 228.28,87.63 229.87,87.63 NU32_JACK.GND 228.28,87.63 | 228.28,87.63 225.43,84.77 NU32_JACK.GNDBREAK
NU32PWR  (via drill 0.41)
  Top 0.508: v183.83,84.77 51.44,84.77 38.42,71.75 3.81,71.75 3.81,35.88 6.03,33.65 X1.6 | v187.32,84.77 190.5,81.6 229.87,81.6 NU32_JACK.PWR
  Bottom 0.508: v187.32,84.77 v183.83,84.77
PS_ON
  Bottom 0.508: S1.2 10.16,73.98 14.61,69.53 14.61,27.94 11.75,25.08 X1.16
PS_ONGND  (via drill 0.41)
  Top 0.508: v1.91,31.75 1.91,26.04 4.76,23.18 9.21,23.18 11.43,20.96 X1.15 | v3.49,33.34 3.49,34.93 2.86,35.56 2.86,72.71 11.11,72.71 14.61,76.2 S1.3
  Bottom 0.508: v3.49,33.34 v1.91,31.75
RPI_GND
  Top 0.508: X1.3 6.35,20.64 9.84,17.15 9.84,14.29 13.97,14.29 21.91,6.35 228.6,6.35 229.87,7.62 RPI_JACK.GND 229.87,7.94 231.78,7.94 234.31,10.48 RPI_JACK.GNDBREAK
RPI_PWR
  Top 0.508: X1.4 6.35,24.76 6.99,24.13 9.53,24.13 10.79,22.86 93.66,22.86 102.87,13.65 102.87,11.43 227.65,11.43 229.87,13.65 RPI_JACK.PWR
VDD1
  Top 0.508: SOLF2.1 SOLF#2.1 SOLG2.1 SOLG#2.1 SOLA2.1 SOLA#2.1 SOLB2.1 SOLC3.1 SOLC#3.1 SOLD3.1 SOLD#3.1 SOLE3.1 SOLF3.1 SOLF#3.1 SOLG3.1 SOLG#3.1 | DG#3.C DG3.C DF#3.C DF3.C DE3.C DD#3.C DD3.C DC#3.C DC3.C DB2.C DA#2.C DA2.C DG#2.C DG2.C DF#2.C DF2.C 21.59,26.67 13.02,35.24 9.84,35.24 9.84,46.67 6.35,50.16 X1.10
  Bottom 0.508: SOLG#3.1 114.94,12.07 114.94,22.86 111.76,26.04 DG3.C
VDD2
  Top 0.508: SOLA3.1 SOLA#3.1 SOLB3.1 SOLC4.1 SOLC#4.1 SOLD4.1 SOLD#4.1 SOLE4.1 SOLF4.1 SOLF#4.1 SOLG4.1 SOLG#4.1 SOLA4.1 SOLA#4.1 SOLB4.1 SOLC5.1 | DC5.C DB4.C DA#4.C DA4.C DG#4.C DG4.C DF#4.C DF4.C DE4.C DD#4.C DD4.C DC#4.C DC4.C DB3.C DA#3.C DA3.C 122.56,28.57 20.95,28.57 20.95,40.01 13.02,47.94 9.84,47.94 9.84,50.8 6.35,54.29 X1.11
  Bottom 0.508: SOLB4.1 210.19,12.07 210.19,22.86 207.01,26.04 DA#4.C
(copper drawn outside any net)
  shapes: Top area x1

## Text on the board
Document: AUTOSPIEL v1.2a GND Layer | OFF | ON | Designer: Jonathan Westerfield '19 | NU_32 PWR | F2 | A3 | F#2 | A#3 | G2 | B3 | G#2 | C4 | A2 | C#4 | PSU PWR CONN | A#2 | D4 | B2 | D#4 | C3 | E4 | C#3 | F4 | D3 | F#4 | D#3 | G4 | E3 | G#4 | F3 | A4 | F#3 | A#4 | G3 | B4 | G#3 | C5 | F2 | F#2 | G2 | G#2 | A2 | A#2 | B2 | C3 | C#3 | D3 | D#3 | E3 | F3 | F#3 | G3 | G#3 | A3 | A#3 | B3 | C4 | C#4 | D4 | D#4 | E4 | F4 | F#4 | G4 | G#4 | A4 | A#4 | B4 | C5 | F2 | F#2 | G2 | G#2 | A2 | A#2 | B2 | C3 | C#3 | D3 | D#3 | E3 | F3 | F#3 | G3 | G#3 | A3 | A#3 | B3 | C4 | C#4 | D4 | D#4 | E4 | F4 | F#4 | G4 | G#4 | A4 | A#4 | B4 | C5 | RPI PWR